# EAGLE board A13-LCD10TS_Rev_A (EAGLE 6.4)
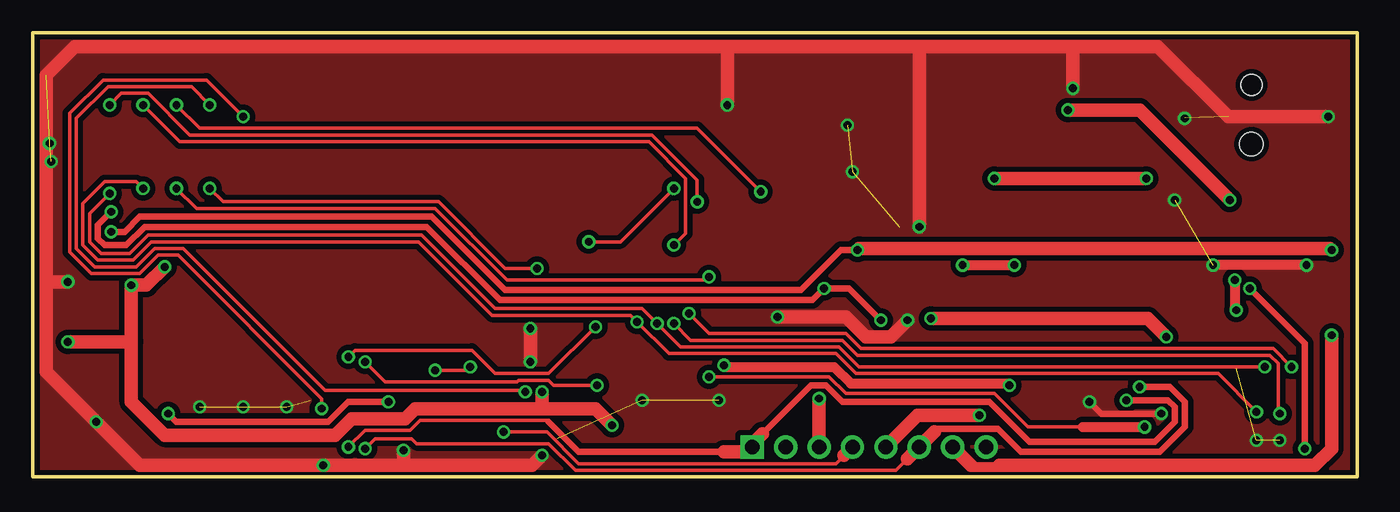
[diagram p0: board, top side]
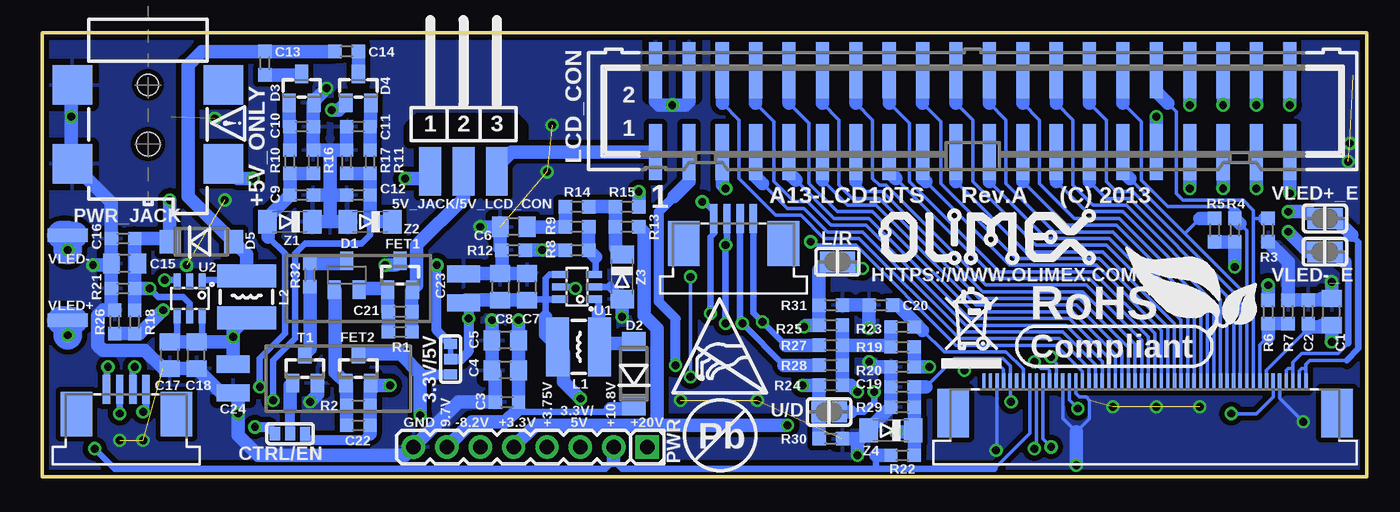
[diagram p1: board, bottom side, seen from below]

Size 100.76 x 33.81 mm. Coordinates in mm from the lower left corner, seen from the top.
Outline: 0,33.81 0,0 100.76,0 100.76,33.81 0,33.81
Copper layers (1+16): Top 0.035mm / dielectric 1.5mm / Bottom 0.035mm
Design rules "default": minimum track width 9.5mil, minimum drill 0.6mm, track to track 9.5mil, track to pad 9.5mil, pad to pad 9.5mil, via to via 10mil, smd to smd 1mil, copper to edge 10mil, drill to drill 8mil, minimum pad ring 8mil, minimum via ring 8mil, stop-mask expansion 4mil, vias tented up to drill 25mil, thermal gap 20mil
Net classes: 1 pwr: width 0.254 mm, drill 0.254 mm, clearance 0.241 mm
bRestrict: 5 lines

## Footprints (pad centres in the part's own frame; a part is rotated, then mirrored left to right if it is on the bottom)
SJ_2_SMALL_12_TIED = smd 0.762 x 1.016: 1 -1.143,0; 2 0,0; 3 1.143,0
HN1X3-SMD = smd 1.651 x 3.683: 1 -2.54,-0.229; 2 0,-0.229; 3 2.54,-0.229
C0805_5MIL_DWS = smd 1.27 x 1.524: 1 -1.016,0; 2 1.016,0
C0603_DWS = smd 1.016 x 1.016: 1 -0.889,0; 2 0.889,0
C-SMD5X11-M = smd 2.5 x 1.3: + 0,-1.1; - 0,1.1
SJ_2_SMALL = smd 0.762 x 1.016: 1 -1.143,0; 2 0,0; 3 1.143,0
SOT23C = smd 1 x 1.4: 1 -0.95,-1.1; 2 0.95,-1.1; 3 0,1.1
MLL-41 = smd 1.45 x 1.8: A 2.445,0; K -2.445,0
SOT23C(BAT54S) = smd 1 x 1.4: 1 -0.95,-1.1; 2 0.95,-1.1; 3 0,1.1
SOT23 = smd 1 x 1.4: 1 -0.95,-1.1; 2 0.95,-1.1; 3 0,1.1
CD42(43) = smd 4.5 x 1.75: 1 0,1.6; 2 0,-1.6
SJ = smd 1.168 x 1.6: 1 -0.762,0; 2 0.762,0
LCD10"_TOUCH(F101T50) = smd 0.25 x 1.3 bottom: 1 104.95,54.35; 2 105.45,54.35; 3 105.95,54.35; 4 106.45,54.35; 5 106.95,54.35; 6 107.45,54.35; 7 107.95,54.35; 8 108.45,54.35; 9 108.95,54.35; 10 109.45,54.35; 11 109.95,54.35; 12 110.45,54.35; 13 110.95,54.35; 14 111.45,54.35; 15 111.95,54.35; 16 112.45,54.35; 17 112.95,54.35; 18 113.45,54.35; 19 113.95,54.35; 20 114.45,54.35; 21 114.95,54.35; 22 115.45,54.35; 23 115.95,54.35; 24 116.45,54.35; 25 116.95,54.35; 26 117.45,54.35; 27 117.95,54.35; 28 118.45,54.35; 29 118.95,54.35; 30 119.45,54.35; 31 119.95,54.35; 32 120.45,54.35; 33 120.95,54.35; 34 121.45,54.35; 35 121.95,54.35; 36 122.45,54.35; 37 122.95,54.35; 38 123.45,54.35; 39 123.95,54.35; 40 124.45,54.35; 41 124.95,54.35; 42 125.45,54.35; 43 125.95,54.35; 44 126.45,54.35; 45 126.95,54.35; 46 127.45,54.35; 47 127.95,54.35; 48 128.45,54.35; 49 128.95,54.35; 50 129.45,54.35 | smd 0.55 x 2.2 bottom: 51 193.195,53.799; 52 194.195,53.799; 53 195.195,53.799; 54 196.195,53.799; 55 146.995,66.799; 56 147.995,66.799; 57 148.995,66.799; 58 149.995,66.799 | smd 2.4 x 3.7 bottom: P1 131.8,51.975; P2 102.6,51.975 | smd 2.4 x 3.4 bottom: P3 190.895,51.899; P4 198.495,51.899; P5 144.695,64.899; P6 152.295,64.899
ML40-MALE(GBH-254-SMT-40) = smd 1 x 4.25: 1 -24.13,-3.125; 2 -24.13,3.125; 3 -21.59,-3.125; 4 -21.59,3.125; 5 -19.05,-3.125; 6 -19.05,3.125; 7 -16.51,-3.125; 8 -16.51,3.125; 9 -13.97,-3.125; 10 -13.97,3.125; 11 -11.43,-3.125; 12 -11.43,3.125; 13 -8.89,-3.125; 14 -8.89,3.125; 15 -6.35,-3.125; 16 -6.35,3.125; 17 -3.81,-3.125; 18 -3.81,3.125; 19 -1.27,-3.125; 20 -1.27,3.125; 21 1.27,-3.125; 22 1.27,3.125; 23 3.81,-3.125; 24 3.81,3.125; 25 6.35,-3.125; 26 6.35,3.125; 27 8.89,-3.125; 28 8.89,3.125; 29 11.43,-3.125; 30 11.43,3.125; 31 13.97,-3.125; 32 13.97,3.125; 33 16.51,-3.125; 34 16.51,3.125; 35 19.05,-3.125; 36 19.05,3.125; 37 21.59,-3.125; 38 21.59,3.125; 39 24.13,-3.125; 40 24.13,3.125
HN1X8 = drill 1.1 pad 1.778 square: 1 -8.89,0 | drill 1.1 pad 1.778: 2 -6.35,0; 3 -3.81,0; 4 -1.27,0; 5 1.27,0; 6 3.81,0; 7 6.35,0; 8 8.89,0
PWR-JACK-SMD = smd 3 x 3: 1 6,5.75; 2 0,-5.75; 3 6,-5.75; 4 0,5.75 | hole 1.6: 0,0 | hole 1.8: 4.5,0
R0603_5MIL_DWS = smd 1.016 x 1.016: 1 -0.889,0; 2 0.889,0
0603_0R = smd 1.016 x 1.016: 1 -0.889,0; 2 0.889,0
SOT-23 = smd 1 x 1.4: 1 -0.95,-1.1; 2 0.95,-1.1; 3 0,1.1
SOT23-6 = smd 0.55 x 1.2: 1 -0.95,-1.3; 2 0,-1.3; 3 0.95,-1.3; 4 0.95,1.3; 5 0,1.3; 6 -0.95,1.3
SMD120X40 = smd 3.048 x 1.016: 1 0,0
MINI-MELF = smd 1.4 x 1.8: 1 -1.7,0; 2 1.7,0

## Placement (x,y rotation side)
3.3V/5V  5V:Close/3.3V:Open  [SJ_2_SMALL_12_TIED]  69.69,8.97 270 bottom
5V_JACK/5V_LCD_CON  H-WX-1x3  [HN1X3-SMD]  68.71,23.5 0 bottom
C1  22uF/6.3V  [C0805_5MIL_DWS]  2.67,12.57 90 bottom
C2  100nF  [C0603_DWS]  4.45,12.57 90 bottom
C3  100nF  [C0603_DWS]  65.41,5.71 180 bottom
C4  1uF/25V  [C0805_5MIL_DWS]  65.53,8.13 180 bottom
C5  1uF/25V  [C0805_5MIL_DWS]  65.53,10.41 180 bottom
C6  10uF/16V  [C0805_5MIL_DWS]  64.9,19.05 180 bottom
C7  22uF/6.3V  [C0805_5MIL_DWS]  63.88,14.48 270 bottom
C8  22uF/6.3V  [C0805_5MIL_DWS]  65.91,14.48 270 bottom
C9  100nF  [C0603_DWS]  81.03,21.46 0 bottom
C10  100nF  [C0603_DWS]  81.03,26.67 0 bottom
C11  100nF  [C0603_DWS]  76.71,26.67 180 bottom
C12  100nF  [C0603_DWS]  76.71,21.46 180 bottom
C13  100nF  [C0603_DWS]  83.82,31.5 90 bottom
C14  100nF  [C0603_DWS]  77.6,32.38 0 bottom
C15  10uF/16V  [C0805_5MIL_DWS]  94.49,16.26 180 bottom
C16  100nF  [C0603_DWS]  94.61,18.16 180 bottom
C17  22uF/6.3V  [C0805_5MIL_DWS]  91.06,9.27 90 bottom
C18  22uF/6.3V  [C0805_5MIL_DWS]  89.03,9.27 90 bottom
C19  100nF  [C0603_DWS]  35.31,6.86 180 bottom
C20  100nF  [C0603_DWS]  36.96,13.08 180 bottom
C21  NA  [C0603_DWS]  73.53,12.57 180 bottom
C22  NA  [C0603_DWS]  76.71,3.94 180 bottom
C23  NA(100uF/16V)  [C-SMD5X11-M]  68.71,14.35 0 bottom
C24  NA(100uF/16V)  [C-SMD5X11-M]  86.23,7.49 180 bottom
CTRL/EN  CTRL:Close/EN:Open  [SJ_2_SMALL]  81.92,3.3 180 bottom
D1  BAT54C  [SOT23C]  77.6,15.37 0 bottom
D2  1N5819/SS14  [MLL-41]  55.75,7.87 90 bottom
D3  BAT54S  [SOT23C(BAT54S)]  81.03,29.59 0 bottom
D4  BAT54S  [SOT23C(BAT54S)]  76.71,29.59 0 bottom
D5  1N5819/SS14  [MLL-41]  88.65,17.91 0 bottom
FET1  IRLML6402  [SOT23]  73.53,15.37 0 bottom
FET2  IRLML6402  [SOT23]  76.71,8.26 0 bottom
L1  4.7uH/1.15A/DCR<0.1R/CD43  [CD42(43)]  59.94,9.91 90 bottom
L2  4.7uH/1.15A/DCR<0.1R/CD43  [CD42(43)]  85.22,13.72 180 bottom
L/R  Open  [SJ]  40.26,16.38 0 bottom
LCD  F101T50+(FPV-WZA21-50-LF)+(FPA-WZB25-04-LF)  [LCD10"_TOUCH(F101T50)]  -100.33,-47.12 0 top
LCD_CON  ML40-GBH-254-SMT-40  [ML40-MALE(GBH-254-SMT-40)]  29.97,27.86 0 bottom
PWR  NA(HN1X8)  [HN1X8]  63.63,2.29 180 bottom
PWR_JACK  DCJ-W54R-20-LF  [PWR-JACK-SMD]  92.71,29.84 270 bottom
R1  10k  [R0603_5MIL_DWS]  73.53,11.05 0 bottom
R2  10k  [R0603_5MIL_DWS]  76.71,5.46 0 bottom
R3  NA  [R0603_5MIL_DWS]  7.49,18.8 90 bottom
R4  NA  [R0603_5MIL_DWS]  10.03,18.8 90 bottom
R5  NA  [R0603_5MIL_DWS]  11.56,18.8 90 bottom
R6  NA  [R0603_5MIL_DWS]  7.49,12.57 270 bottom
R7  10k  [R0603_5MIL_DWS]  5.97,12.57 270 bottom
R8  2.2k  [R0603_5MIL_DWS]  60.07,17.27 180 bottom
R9  20k  [R0603_5MIL_DWS]  60.07,19.05 180 bottom
R10  1.05k/1%  [R0603_5MIL_DWS]  81.92,24 90 bottom
R11  1.05k/1%  [R0603_5MIL_DWS]  75.82,24 90 bottom
R12  1.1R  [R0603_5MIL_DWS]  64.9,17.27 180 bottom
R13  4.7k  [R0603_5MIL_DWS]  56.26,19.05 0 bottom
R14  4.7k  [R0603_5MIL_DWS]  60.07,20.57 180 bottom
R15  220R  [R0603_5MIL_DWS]  56.26,20.57 180 bottom
R16  56.2k/1%  [R0603_5MIL_DWS]  80.14,24 270 bottom
R17  56.2k/1%  [R0603_5MIL_DWS]  77.6,24 270 bottom
R18  56.2k/1%  [R0603_5MIL_DWS]  93.73,11.81 90 bottom
R19  10k  [R0603_5MIL_DWS]  35.31,9.91 0 bottom
R20  NA  [R0603_5MIL_DWS]  35.31,8.38 0 bottom
R21  20k  [R0603_5MIL_DWS]  94.61,14.35 0 bottom
R22  1.05k/1%  [R0603_5MIL_DWS]  35.31,1.65 0 bottom
R23  10k  [R0603_5MIL_DWS]  35.31,11.43 0 bottom
R24  NA  [R0603_5MIL_DWS]  40.77,6.99 180 bottom
R25  10k  [R0603_5MIL_DWS]  40.77,11.56 180 bottom
R26  1.05k/1%  [R0603_5MIL_DWS]  95.25,11.81 90 bottom
R27  NA  [R0603_5MIL_DWS]  40.77,10.03 180 bottom
R28  NA  [R0603_5MIL_DWS]  40.77,8.51 180 bottom
R29  562R/1%  [R0603_5MIL_DWS]  35.31,5.33 180 bottom
R30  10k  [R0603_5MIL_DWS]  40.77,2.92 0 bottom
R31  NA  [R0603_5MIL_DWS]  40.77,13.08 0 bottom
R32  0R(Board_Mounted)  [0603_0R]  80.39,15.37 270 bottom
T1  DTC114YKA  [SOT-23]  80.77,8.26 0 bottom
U1  AP3031KTR-G1  [SOT23-6]  60.07,14.48 90 bottom
U2  AP3031KTR-G1  [SOT23-6]  89.53,13.59 180 bottom
U$4  [ATTENTION_SMALL]  85.34,25.65 90 bottom
U$8  [OLIMEX1_V]  19.43,16.02 0 bottom
U$9  [PB]  49.18,3.18 0 bottom
U$10  [ESD_SYMBOL]  52.78,6.42 0 bottom
U$11  [RECYCLE_BIN1/8]  32.36,8.27 0 bottom
U$12  [ROHS]  25.61,9.06 0 bottom
U/D  Open  [SJ]  40.89,4.95 0 bottom
VLED+  TESTPAD120X40  [SMD120X40]  98.81,11.94 180 bottom
VLED+_E  NA  [SJ]  3.17,19.68 180 bottom
VLED-  TESTPAD120X40  [SMD120X40]  98.81,18.41 180 bottom
VLED-_E  NA  [SJ]  3.17,17.14 180 bottom
Z1  BZV55C8V2  [MINI-MELF]  81.92,19.43 180 bottom
Z2  BZV55C20  [MINI-MELF]  75.82,19.43 180 bottom
Z3  NA(BZV55C3V0)  [MINI-MELF]  56.64,15.24 270 bottom
Z4  NA(BZV55C3V9)  [MINI-MELF]  36.2,3.56 180 bottom

## Library data of the parts
3.3V/5V 5V_JACK/5V_LCD_CON CTRL/EN L/R U/D VLED+_E VLED-_E = jumper
C1-C24 R1-R31 = rcl
D1 D3 D4 = semicon-smd-ipc
D2 D5 PWR_JACK VLED+ VLED- Z1-Z4 = gogo
FET1 FET2 PWR = Penko
L1 L2 R32 T1 = OLIMEX_DISCRET
LCD = olimex_lcd
LCD_CON = con-harting-ml
U1 U2 = OLIMEX_IC
U$4 U$8-U$12 = olimex_logo1

## Nets
+5V: 3.3V/5V.2 C7.2 C8.2 C17.2 C18.2 C23.+ C24.+ L1.1 L2.1 PWR.3 U1.4 U1.6 U2.4 U2.6
+12V: C15.1 C16.1 D4.1 D5.K LCD.43 PWR.2 R18.2 R21.2 R22.1 U2.5
+15V: C12.1 LCD.41 PWR.1 R11.1 R17.2 Z2.1
-24V: C9.1 LCD.42 PWR.6 R10.1 R16.2 Z1.2
GND [pwr]: C1.2 C2.2 C3.2 C4.2 C5.2 C6.2 C7.1 C8.1 C9.2 C10.2 C11.2 C12.2 C15.2 C16.2 C17.1 C18.1 C19.2 C20.2 C23.- C24.- D3.2 LCD.5 LCD.36 LCD.38 LCD.48 LCD_CON.2 LCD_CON.4 PWR.8 PWR_JACK.2 PWR_JACK.3 R3.1 R7.1 R12.2 R16.1 R17.1 R20.1 R21.1 R26.2 R29.2 R30.2 R31.2 T1.2 U1.2 Z1.1 Z2.2 Z3.2 Z4.2
LCD_B0: LCD.19 LCD_CON.21
LCD_B1: LCD.18 LCD_CON.22
LCD_B2: LCD.17 LCD_CON.23
LCD_B3: LCD.16 LCD_CON.24
LCD_B4: LCD.15 LCD_CON.25
LCD_B5: LCD.14 LCD_CON.26
LCD_B6: LCD.13 LCD_CON.27
LCD_B7: LCD.12 LCD_CON.28
LCD_BKL: LCD_CON.36 R15.1
LCD_CLK: LCD.37 LCD_CON.31
LCD_DE: LCD.9 LCD_CON.32 R3.2
LCD_G0: LCD.27 LCD_CON.13
LCD_G1: LCD.26 LCD_CON.14
LCD_G2: LCD.25 LCD_CON.15
LCD_G3: LCD.24 LCD_CON.16
LCD_G4: LCD.23 LCD_CON.17
LCD_G5: LCD.22 LCD_CON.18
LCD_G6: LCD.21 LCD_CON.19
LCD_G7: LCD.20 LCD_CON.20
LCD_HSYNC: LCD.11 LCD_CON.29 R5.2
LCD_L/R: L/R.1 LCD.39 R25.2 R31.1
LCD_PWRE: CTRL/EN.3 LCD_CON.35
LCD_R0: LCD.35 LCD_CON.5
LCD_R1: LCD.34 LCD_CON.6
LCD_R2: LCD.33 LCD_CON.7
LCD_R3: LCD.32 LCD_CON.8
LCD_R4: LCD.31 LCD_CON.9
LCD_R5: LCD.30 LCD_CON.10
LCD_R6: LCD.29 LCD_CON.11
LCD_R7: LCD.28 LCD_CON.12
LCD_U/D: LCD.40 R24.2 R30.1 U/D.1
LCD_VSYNC: LCD.10 LCD_CON.30 R4.2
N$1: LCD.8 R6.2 R7.2
N$2: C14.2 D4.3
N$3 [pwr]: C22.1 CTRL/EN.1 FET2.2 LCD_CON.3 R2.2
N$4: C11.1 D4.2 R11.2
N$5: R8.1 R9.1 U1.3
N$6: C10.1 D3.1 R10.2
N$7: 5V_JACK/5V_LCD_CON.2 C21.1 FET1.2 R1.2
N$8: C22.2 D1.1 FET2.1 R2.1
N$9: C21.2 D1.2 FET1.1 R1.1
N$10: C13.1 D3.3
N$11: R32.2 T1.3
N$12: C6.1 R9.2 R14.2
N$13: D2.A L1.2 U1.1
N$14: R13.1 R14.1 R15.2 Z3.1
N$15: L/R.2 LCD_CON.33
N$16: CTRL/EN.2 T1.1
N$17: LCD_CON.34 U/D.2
N$18: 3.3V/5V.1 FET1.3
N$19: D1.3 R32.1
N$20: 5V_JACK/5V_LCD_CON.3 LCD_CON.1
N$21: LCD.1 LCD.2 VLED+_E.1
N$22: 5V_JACK/5V_LCD_CON.1 PWR_JACK.1
N$23: LCD.3 LCD.4 VLED-_E.1
N$24 [pwr]: U2.2
N$42: LCD.47 R19.2 R20.2
N$123: C13.2 C14.1 D5.A L2.2 U2.1
N$126: R18.1 R26.1 U2.3
RESET: C20.1 LCD.44 R23.2
TPX1: LCD.51 LCD.55 LCD_CON.37 R27.2
TPX2: LCD.53 LCD.57 LCD_CON.38
TPY1: LCD.52 LCD.56 LCD_CON.39 R28.2
TPY2: LCD.54 LCD.58 LCD_CON.40
VCC [pwr]: 3.3V/5V.3 C1.1 C2.1 FET2.3 LCD.7 PWR.5 R4.1 R5.1 R6.1 R13.2 R19.1 R23.1 R24.1 R25.1 R27.1 R28.1
VCOM: C19.1 LCD.6 LCD.46 PWR.4 R22.2 R29.1 Z4.1
VLED+: C3.1 C4.1 C5.1 D2.K PWR.7 U1.5 VLED+.1 VLED+_E.2
VLED-: R8.2 R12.1 VLED-.1 VLED-_E.2

## Tracks (layer width: path | path; a pad name or v marks a point on that pad's centre or on a via)
+5V  (via drill 0.6)
  Top 1.016: v68.33,12.06 84.84,12.06 v86.23,10.67 | PWR.3 v59.82,5.97
  Bottom 0.508: 62.48,13.53 63.81,13.53 C7.2 | U1.4 62.17,15.43 62.48,15.11 62.48,13.59 | U2.6 88.58,10.73 C18.2 | U2.4 90.48,10.86 C17.2 | 62.48,13.53 U1.6 | 62.48,13.59 62.48,13.53 | 62.48,12.19 62.48,13.59
  Bottom 0.762: 3.3V/5V.2 68.88,8.97 68.33,9.53 v68.33,12.06 68.33,12.87 C23.+
  Bottom 1.016: L2.1 86.23,11.1 v86.23,10.67 86.23,10.29 | 86.23,10.29 C24.+ | C17.2 C18.2 86.23,10.29 | C23.+ 68.5,13.46 C8.2 C7.2 | 62.48,12.19 62.48,10.85 L1.1 61.09,9.45 61.09,7.24 v59.82,5.97
+12V  (via drill 0.6)
  Top 0.508: v96.77,2.16 96.77,10.16 v92.58,14.35
  Top 1.016: v91.06,21.08 84.2,27.94 v78.74,27.94
  Bottom 0.254: LCD.43 25.62,3.34 28.32,0.64
  Bottom 0.508: v92.58,14.35 91.95,13.72 90.04,13.72 89.53,13.21 U2.5 | 28.32,0.64 37.34,0.64 | 37.34,0.64 56.64,0.64 57.28,1.27 57.91,0.64 95.25,0.64 v96.77,2.16 | 37.34,0.64 37.34,1.65
  Bottom 1.016: R21.2 93.73,16.26 C15.1 93.73,16.51 C16.1 91.34,18.16 D5.K 91.06,17.94 v91.06,21.08 | v92.58,14.35 R21.2 | R21.2 R18.2 | 37.34,1.65 R22.1 | 57.28,1.27 PWR.2 | D4.1 78.21,27.94 v78.74,27.94
+15V  (via drill 0.6)
  Top 0.254: v24,2.29 25.27,3.56 28.7,3.56 29.46,4.32 39.12,4.32 39.24,4.19
  Top 0.508: 39.24,4.19 41.53,1.91 52.58,1.91 | v83.19,5.84 86.36,5.84 86.87,5.33 86.87,4.19 85.34,2.67 75.82,2.67 72.77,5.71 61.59,5.71 60.33,6.99 59.18,6.99 55.5,3.3
  Top 1.016: 52.58,1.91 54.48,1.91 54.48,2.03 PWR.1 54.74,2.54 55.5,3.3
  Bottom 0.254: v24,2.29 24.62,2.9 LCD.41
  Bottom 0.508: v83.19,5.84 83.19,8.89 81.53,10.54 81.53,17.02 80.77,17.78 76.45,17.78 75.82,18.41 75.82,19.43
  Bottom 0.762: 74.12,19.35 Z2.1
  Bottom 1.016: R17.2 R11.1 C12.1 75.82,19.43 74.2,19.43 74.12,19.35
-24V  (via drill 0.6)
  Top 0.254: 66.55,1.4 65.66,0.51 41.27,0.51 39.24,2.54 29.21,2.54 28.83,2.92 26.04,2.92 v25.27,2.16
  Top 0.508: 68.58,3.43 68.83,3.68 73.41,3.68 75.18,1.91 85.72,1.91 87.63,3.81 87.63,5.71 86.49,6.86 v84.2,6.86
  Top 1.016: 68.58,3.43 PWR.6 66.55,1.4
  Bottom 0.254: LCD.42 25.12,2.31 v25.27,2.16
  Bottom 0.508: 83.57,18.29 82.3,17.02 82.3,10.92 84.2,9.02 v84.2,6.86
  Bottom 1.016: R16.2 R10.1 C9.1 83.61,19.76 Z1.2 83.57,19.38 83.57,18.29
GND  (via drill 0.6)  (13 unrouted)
  Top 0.508: v80.39,5.71 81.28,4.83 v85.85,4.83
  Top 0.762: v96.9,16.13 v89.79,16.13
  Top 1.016: 52.83,32.77 v52.83,28.32 | 52.83,32.77 3.17,32.77 1.02,30.61 1.02,14.86 | 1.02,14.86 v2.67,14.86 | 1.02,14.86 1.02,8 v4.83,4.19 8.13,0.89 v22.1,0.89 28.19,0.89 | 28.19,0.89 37.97,0.89 v38.73,1.65 | 28.19,0.89 v28.19,2.03 | 79.12,32.77 v79.12,29.59 | 67.44,32.77 79.12,32.77 | v37.85,8.76 v37.85,11.3 | v56.64,12.19 61.85,12.19 63.37,10.67 65.28,10.67 v66.55,11.94 | 67.44,32.77 v67.44,19.05 | 79.12,32.77 85.6,32.77 90.93,27.43 v98.55,27.43 | 52.83,32.77 67.44,32.77
  Bottom 0.254: LCD.38 23.12,4.45 22.1,3.43 21.08,4.45 21.08,5.84 21.34,6.1 21.84,6.1 22.12,6.37 LCD.36 | LCD.48 28.12,2.11 v28.19,2.03 | LCD.5 6.62,5.99 v4.83,4.19
  Bottom 0.508: v89.79,16.13 89.53,15.88 | 57.53,14.48 U1.2
  Bottom 0.762: Z3.2 56.64,13.59 57.53,14.48
  Bottom 1.016: R3.1 5.97,16.38 R7.1 C2.2 3.56,13.46 3.43,13.59 C1.2 v2.67,14.86 | C15.2 C16.2 95.5,20.89 PWR_JACK.3 98.55,23.94 v98.55,27.43 98.55,29.75 PWR_JACK.2 | C15.2 R21.1 95.5,12.95 R26.2 96.14,12.7 96.52,12.32 96.52,10.03 96.14,9.65 92.96,9.65 91.57,8.26 C17.1 C18.1 87.17,6.39 C24.- 85.85,6.01 v85.85,4.83 85.85,3.17 84.33,1.65 73.15,1.65 PWR.8 69.09,5.71 C3.2 66.29,7.87 C4.2 C5.2 v66.55,11.94 | C11.2 R17.1 78.87,24.89 | 78.87,19.43 Z2.2 | 78.87,19.43 Z1.1 | 78.87,24.89 R16.1 C10.2 80.14,28.43 D3.2 80.08,28.64 v79.12,29.59 | 78.87,24.89 78.87,21.46 | 78.87,21.46 C12.2 | 78.87,21.46 C9.2 | 78.87,21.46 78.87,19.43 | T1.2 79.82,6.28 v80.39,5.71 | LCD_CON.2 54.1,28.57 53.85,28.32 v52.83,28.32 51.82,28.32 51.56,28.57 LCD_CON.4 | C23.- 68.66,15.49 C8.1 | C8.1 C7.1 | C8.1 65.79,15.62 R12.2 65.91,17.4 C6.2 v67.44,19.05 | 38.73,2.92 38.53,2.92 Z4.2 37.9,3.63 R29.2 C19.2 R20.1 37.47,8.38 v37.85,8.76 | 38.73,2.92 R30.2 | v38.73,1.65 38.73,2.92 | v22.1,0.89 22.1,3.43 | v37.85,11.3 C20.2 R31.2 | C15.2 95.5,16.13 v96.9,16.13 | v56.64,12.19 Z3.2
  other vias: 12.7,5.33 16,5.33 19.3,5.33 46.35,5.84 52.2,5.84 93.09,2.79 94.87,2.79 1.4,24 87.63,27.3 86.87,21.08 1.27,25.4 62.36,23.24 61.98,26.8
  pour Top (isolate 0.406, rank 2): -2.54,35.56 -2.54,-2.54 104.14,-2.54 104.14,35.56
  pour Bottom (isolate 0.406, rank 3): -5.08,-5.08 109.22,-5.08 109.22,38.1 -5.08,38.1
LCD_B0
  Bottom 0.254: 28.7,22.48 24.38,18.16 19.56,18.16 13.62,12.22 LCD.19
  Bottom 1.016: 28.7,22.48 LCD_CON.21
LCD_B1
  Bottom 0.254: 28.7,28.45 27.43,27.18 27.43,22.35 23.75,18.67 19.3,18.67 13.12,12.48 LCD.18
  Bottom 1.016: 28.7,28.45 LCD_CON.22
LCD_B2
  Bottom 0.254: 26.16,22.48 22.86,19.18 19.05,19.18 12.62,12.75 LCD.17
  Bottom 1.016: 26.16,22.48 LCD_CON.23
LCD_B3
  Bottom 0.254: 26.16,28.45 24.89,27.18 24.89,22.35 22.23,19.68 18.8,19.68 12.12,13.01 LCD.16
  Bottom 1.016: 26.16,28.45 LCD_CON.24
LCD_B4
  Bottom 0.254: 23.62,22.48 21.34,20.19 18.54,20.19 11.62,13.27 LCD.15
  Bottom 1.016: 23.62,22.48 LCD_CON.25
LCD_B5
  Bottom 0.254: LCD.14 11.12,13.53 18.29,20.7 20.83,20.7 22.35,22.23 22.35,27.18 23.62,28.45
  Bottom 1.016: 23.62,28.45 LCD_CON.26
LCD_B6
  Bottom 0.254: 21.08,22.48 19.81,21.21 18.03,21.21 10.62,13.79 LCD.13
  Bottom 1.016: 21.08,22.48 LCD_CON.27
LCD_B7
  Bottom 0.254: 21.08,28.45 19.81,27.18 19.81,22.48 19.05,21.72 17.78,21.72 10.12,14.06 LCD.12
  Bottom 1.016: 21.08,28.45 LCD_CON.28
LCD_BKL  (via drill 0.6)
  Top 0.254: v10.92,28.32 12.7,26.54 50.55,26.54 v55.37,21.72
  Bottom 1.016: v10.92,28.32 LCD_CON.36 | v55.37,21.72 R15.1
LCD_CLK  (via drill 0.6)
  Top 0.254: v21.97,5.21 21.97,5.97 11.05,16.89 9.53,16.89 8.13,15.49 4.45,15.49 2.79,17.14 2.79,27.69 5.33,30.23 13.21,30.23 v16,27.43
  Bottom 0.254: LCD.37 22.62,5.86 v21.97,5.21
  Bottom 1.016: v16,27.43 LCD_CON.31
LCD_DE
  Bottom 0.254: LCD.9 8.62,19.68 | 8.62,19.68 8.62,20.3 9.4,21.08 13.97,21.08 14.48,21.59 14.48,27.81 15.11,28.45 | 8.62,19.68 8.64,19.68 | 8.62,19.68 7.75,19.68
  Bottom 1.016: 15.11,28.45 16,29.34 LCD_CON.32 | 7.75,19.68 R3.2
LCD_G0
  Bottom 0.254: 38.86,22.48 38.1,21.72 36.83,21.72 29.21,14.1 21.59,14.1 17.62,10.13 LCD.27
  Bottom 1.016: 38.86,22.48 LCD_CON.13
LCD_G1
  Bottom 0.254: 38.86,28.45 37.59,27.18 37.59,22.73 37.08,22.23 36.58,22.23 28.96,14.61 21.34,14.61 17.12,10.39 LCD.26
  Bottom 1.016: 38.86,28.45 LCD_CON.14
LCD_G2
  Bottom 0.254: 35.81,22.73 28.19,15.11 21.08,15.11 16.62,10.65 LCD.25
  Bottom 1.016: 35.81,22.73 36.32,23.24 LCD_CON.15
LCD_G3
  Bottom 0.254: 36.32,28.45 34.8,26.92 34.8,22.48 27.94,15.62 20.83,15.62 16.12,10.91 LCD.24
  Bottom 1.016: 36.32,28.45 LCD_CON.16
LCD_G4
  Bottom 0.254: 33.53,22.48 27.18,16.13 20.57,16.13 15.62,11.18 LCD.23
  Bottom 1.016: 33.53,22.48 33.78,22.73 LCD_CON.17
LCD_G5
  Bottom 0.254: 33.78,28.45 32.38,27.05 32.38,22.35 26.67,16.64 20.32,16.64 15.12,11.44 LCD.22
  Bottom 1.016: 33.78,28.45 LCD_CON.18
LCD_G6
  Bottom 0.254: 31.24,22.48 25.91,17.14 20.07,17.14 14.62,11.7 LCD.21
  Bottom 1.016: 31.24,22.48 LCD_CON.19
LCD_G7
  Bottom 0.254: 31.24,28.45 29.97,27.18 29.97,22.48 25.15,17.65 19.81,17.65 14.12,11.96 LCD.20
  Bottom 1.016: 31.24,28.45 LCD_CON.20
LCD_HSYNC
  Bottom 0.254: LCD.11 9.62,14.32 13.84,18.54 | 13.84,18.54 12.7,19.68 | 13.84,18.54 18.03,22.73
  Bottom 1.016: 12.7,19.68 R5.2 | LCD_CON.29 18.54,23.24 18.03,22.73
LCD_L/R  (via drill 0.6)
  Top 0.254: v24,9.14 24.51,9.65 33.4,9.65 35.18,7.87 39.24,7.87 v42.8,11.43
  Bottom 0.254: LCD.39 23.62,8.63 24,9.02 v24,9.14
  Bottom 1.016: v42.8,11.43 42.67,11.56 R25.2 R31.1 41.66,15.75 L/R.1
LCD_PWRE  (via drill 0.6)
  Top 0.254: v10.92,21.97 12.45,20.45 30.61,20.45 36.07,14.99 51.18,14.99 v51.44,15.24 | 79.88,3.81 75.69,3.81 73.15,6.35 61.85,6.35 60.58,7.62 v51.44,7.62
  Top 0.762: 79.88,3.81 v84.58,3.81
  Bottom 0.254: v51.44,15.24 v51.44,7.62
  Bottom 0.762: v84.58,3.81 83.57,3.81 CTRL/EN.3
  Bottom 1.016: v10.92,21.97 LCD_CON.35
LCD_R0  (via drill 0.6)
  Top 0.254: v42.29,17.91 44.7,17.91 v48.77,21.97
  Bottom 0.254: LCD.35 21.62,8.03 23.62,10.03 31.24,10.03 38.86,17.65 42.04,17.65 v42.29,17.91
  Bottom 1.016: v48.77,21.97 49.02,22.23 LCD_CON.5
LCD_R1
  Bottom 0.254: 49.02,28.45 47.75,27.18 47.75,22.73 44.96,19.94 43.05,19.94 41.27,18.16 38.61,18.16 30.99,10.54 23.37,10.54 21.12,8.29 LCD.34
  Bottom 1.016: 49.02,28.45 LCD_CON.6
LCD_R2
  Bottom 0.254: 45.97,22.35 44.07,20.45 42.8,20.45 41.02,18.67 38.35,18.67 30.73,11.05 23.11,11.05 20.62,8.55 LCD.33
  Bottom 1.016: 45.97,22.35 46.48,22.86 LCD_CON.7
LCD_R3
  Bottom 0.254: 46.48,28.45 45.09,27.05 45.09,22.48 43.56,20.95 42.55,20.95 40.77,19.18 38.1,19.18 30.48,11.56 22.86,11.56 20.12,8.82 LCD.32
  Bottom 1.016: 46.48,28.45 LCD_CON.8
LCD_R4
  Bottom 0.254: 43.43,22.61 40.51,19.68 37.85,19.68 30.23,12.06 22.61,12.06 19.62,9.08 LCD.31
  Bottom 1.016: 43.43,22.61 43.94,23.11 LCD_CON.9
LCD_R5
  Bottom 0.254: 43.94,28.45 42.42,26.92 42.42,22.35 40.26,20.19 37.59,20.19 29.97,12.57 22.35,12.57 19.12,9.34 LCD.30
  Bottom 1.016: 43.94,28.45 LCD_CON.10
LCD_R6
  Bottom 0.254: 41.4,22.61 39.5,20.7 37.34,20.7 29.72,13.08 22.1,13.08 18.62,9.6 LCD.29
  Bottom 1.016: 41.4,22.61 LCD_CON.11
LCD_R7
  Bottom 0.254: 41.4,28.45 40.13,27.18 40.13,22.23 39.12,21.21 37.08,21.21 29.46,13.59 21.84,13.59 18.12,9.87 LCD.28
  Bottom 1.016: 41.4,28.45 LCD_CON.12
LCD_U/D  (via drill 0.6)
  Top 0.254: v25.27,8.76 26.8,7.24 36.83,7.24 36.96,7.37 39.24,7.37 39.62,6.99 v42.93,6.99
  Bottom 0.254: LCD.40 24.12,8.12 24.26,8.26 24.77,8.26 v25.27,8.76
  Bottom 1.016: R30.1 U/D.1 R24.2 v42.93,6.99
LCD_VSYNC
  Bottom 0.254: LCD.10 9.12,18.77 9.65,19.3 | 18.54,28.45 17.14,27.05 17.14,22.61 15.11,20.57 10.54,20.57 10.03,20.07
  Bottom 1.016: 18.54,28.45 LCD_CON.30 | 9.65,19.3 R4.2 10.03,20.07
N$1
  Bottom 0.254: LCD.8 8.12,10.04 7.49,10.67
  Bottom 1.016: R7.2 R6.2 7.49,10.67
N$2
  Bottom 1.016: D4.3 C14.2
N$3  (via drill 0.6)
  Top 0.762: v74.3,6.99 74.17,7.11 62.23,7.11 60.96,8.38 52.7,8.38 v52.58,8.51
  Bottom 0.762: 75.82,3.3 76.33,2.79 80.77,2.79 CTRL/EN.1 | v52.58,8.51 52.58,12.06 53.85,13.34 53.85,20.19 52.7,21.34
  Bottom 1.016: 75.82,3.3 C22.1 R2.2 75.82,7.16 FET2.2 75.59,6.99 v74.3,6.99 | LCD_CON.3 51.56,22.48 52.7,21.34
N$4
  Bottom 1.016: D4.2 75.76,26.73 C11.1 R11.2
N$5
  Bottom 0.508: U1.3 58.67,15.53 58.67,16.76
  Bottom 1.016: R9.1 R8.1 58.67,16.76
N$6
  Bottom 1.016: D3.1 81.98,26.73 C10.1 R10.2
N$7
  Bottom 1.016: R1.2 C21.1 72.64,14.21 FET1.2 72.26,14.59 72.26,17.65 68.71,21.21 5V_JACK/5V_LCD_CON.2
N$8
  Bottom 1.016: C22.2 R2.1 77.6,7.09 FET2.1 78.49,7.98 78.49,14.21 D1.1
N$9
  Bottom 1.016: D1.2 76.56,14.35 74.57,14.35 FET1.1 74.48,12.63 C21.2 R1.1
N$10
  Bottom 1.016: D3.3 81.11,30.61 C13.1
N$11
  Bottom 1.016: T1.3 80.39,9.74 R32.2
N$12
  Bottom 1.016: R14.2 R9.2 C6.1
N$13
  Bottom 0.508: U1.1 58.42,13.53 58.42,12.57
  Bottom 1.016: D2.A 55.91,10.16 58.09,10.16 L1.2 58.42,9.98 58.42,12.57
N$14
  Bottom 1.016: R14.1 R15.2 R13.1 57.15,17.45 Z3.1
N$15  (via drill 0.6)
  Top 0.254: v13.46,21.97 14.48,20.95 30.86,20.95 35.94,15.88 v38.35,15.88
  Bottom 1.016: v13.46,21.97 LCD_CON.33 | v38.35,15.88 38.99,15.88 L/R.2
N$16
  Bottom 0.762: CTRL/EN.2 81.92,5.21
  Bottom 1.016: T1.1 81.92,6.96 81.92,5.21
N$17  (via drill 0.6)
  Top 0.254: v13.46,28.32 12.06,29.72 5.71,29.72 3.3,27.3 3.3,17.4 4.7,16 7.87,16 9.27,17.4 11.43,17.4 22.23,6.6 37.34,6.6 v37.47,6.48
  Bottom 0.508: v37.47,6.48 37.47,5.71 38.23,4.95 39.24,4.95
  Bottom 1.016: v13.46,28.32 LCD_CON.34 | 39.24,4.95 U/D.2
N$18  (via drill 0.6)
  Top 0.762: v70.74,16.13 v74.68,16.13
  Bottom 0.762: 3.3V/5V.1 70.74,11.16 v70.74,16.13
  Bottom 1.016: FET1.3 73.87,16.13 v74.68,16.13
N$19
  Bottom 1.016: D1.3 77.81,16.26 R32.1
N$20
  Bottom 1.016: 66.17,23.62 66.17,22.73 | LCD_CON.1 65.05,24.73 66.17,23.62 | 66.17,23.62 5V_JACK/5V_LCD_CON.3
N$21
  Bottom 0.254: LCD.1 4.62,8.26 | 4.62,8.26 4.62,8.59 4.32,8.89 1.52,8.89 | LCD.2 5.12,8.09 4.95,8.26 4.62,8.26
  Bottom 0.508: 1.52,8.89 0.64,9.78 0.64,17.91 1.14,18.41
  Bottom 1.016: 1.14,18.41 VLED+_E.1
N$22  (via drill 0.6)
  Top 1.016: v73.15,22.73 v84.71,22.73
  Bottom 1.016: 5V_JACK/5V_LCD_CON.1 71.78,22.73 v73.15,22.73 | PWR_JACK.1 85.85,22.73 v84.71,22.73
N$23
  Bottom 0.254: 5.62,8.26 LCD.3 | 5.62,8.26 5.62,8.73 4.95,9.4 2.16,9.4 1.4,10.16 | LCD.4 6.12,8.1 5.97,8.26 5.62,8.26
  Bottom 0.508: 1.65,16.38 1.4,16.13 1.4,10.16
  Bottom 1.016: 1.65,16.38 VLED-_E.1
N$42  (via drill 0.6)
  Top 0.254: v30.61,8.13 33.02,8.13 v33.27,8.38
  Bottom 0.254: LCD.47 27.62,8.19 27.81,8.38 30.35,8.38 v30.61,8.13
  Bottom 1.016: v33.27,8.38 R20.2 R19.2
N$123
  Bottom 0.508: L2.2 85.55,14.99 88.49,14.99 U2.1
  Bottom 1.016: C14.1 C13.2 88.65,32.38 89.66,31.37 89.66,21.37 D5.A 85.22,16.92 L2.2
N$126  (via drill 0.6)
  Top 0.762: v91.57,12.7 91.44,12.83 v91.44,14.99
  Bottom 0.508: U2.3 90.48,14.99 v91.44,14.99
  Bottom 1.016: R26.1 R18.1 93.34,10.92 v91.57,12.7
RESET
  Bottom 0.254: LCD.44 26.12,8.21 27.43,9.53 32.13,9.53 33.78,11.18
  Bottom 1.016: 34.42,11.81 R23.2 | C20.1 35.69,13.08 34.42,11.81 | 33.78,11.18 34.42,11.81
TPX1  (via drill 0.6)
  Top 0.254: v93.09,4.95 90.17,7.87 62.61,7.87 61.09,9.4 48.39,9.4 v45.97,11.81 45.47,12.32 34.92,12.32 29.34,17.91 9.02,17.91 7.62,16.51 4.95,16.51 3.81,17.65 3.81,20.83 5.46,22.48 7.87,22.48 v8.38,21.97
  Bottom 0.508: LCD.55 46.66,12.5 v45.97,11.81 44.2,10.03 | LCD.51 92.86,5.18 v93.09,4.95
  Bottom 1.016: v8.38,21.97 LCD_CON.37 | 44.2,10.03 R27.2
TPX2  (via drill 0.6)
  Top 0.254: v8.38,28.32 11.18,25.53 46.86,25.53 49.66,22.73 49.66,18.54 v48.77,17.65 | v94.87,4.83 94.74,4.95 94.74,8.64 94.11,9.27 62.74,9.27 61.59,10.41 50.04,10.41 v48.77,11.68
  Bottom 0.508: LCD.57 48.66,17.76 v48.77,17.65 v48.77,11.68 | LCD.53 v94.87,4.83
  Bottom 1.016: v8.38,28.32 LCD_CON.38
TPY1  (via drill 0.6)
  Top 0.254: v93.73,8.38 62.87,8.38 61.34,9.91 49.28,9.91 v47.5,11.68 46.35,12.83 35.18,12.83 29.59,18.41 8.76,18.41 7.37,17.02 5.21,17.02 4.32,17.91 4.32,20.07 v5.84,21.59
  Bottom 0.508: LCD.52 93.86,8.24 v93.73,8.38 | LCD.56 47.66,11.85 v47.5,11.68 44.32,8.51
  Bottom 1.016: 44.32,8.51 R28.2 | v5.84,21.59 LCD_CON.39
TPY2  (via drill 0.6)
  Top 0.254: v5.84,28.32 6.73,29.21 8.76,29.21 11.94,26.04 47.12,26.04 50.55,22.61 v50.55,20.95 | v95.76,8.38 94.36,9.78 62.99,9.78 61.85,10.92 51.44,10.92 v49.91,12.45
  Bottom 0.508: v50.55,20.95 50.42,20.95 49.66,20.2 LCD.58 49.66,18.53 49.91,18.29 v49.91,12.45 | LCD.54 95.86,8.28 v95.76,8.38
  Bottom 1.016: v5.84,28.32 LCD_CON.40
VCC  (via drill 0.6)
  Top 1.016: 7.49,10.29 v7.49,14.61 8.64,14.61 v10.03,16 | 7.49,10.29 7.49,5.71 10.03,3.17 22.99,3.17 24.26,4.45 28.32,4.45 29.08,5.21 38.73,5.21 | 7.49,10.29 v2.67,10.29 | 38.73,5.21 v38.73,6.48 | 38.73,5.21 42.8,5.21 v44.07,3.94 | v72.01,4.7 67.31,4.7 PWR.5
  Bottom 0.254: 4.45,11.3 7.62,8.13 LCD.7
  Bottom 0.762: 3.3V/5V.3 71.97,7.83 72.01,7.83
  Bottom 1.016: 4.45,11.3 C2.1 4.19,11.43 3.56,11.43 3.43,11.56 C1.1 v2.67,10.29 | R5.1 R4.1 v10.03,16 | v7.49,14.61 R6.1 | R27.1 R28.1 R24.1 39.24,6.99 v38.73,6.48 | R27.1 R25.1 | 36.2,10.03 R19.1 | 36.2,10.03 R23.1 | PWR.5 63.25,3.94 53.98,3.94 | v44.07,3.94 53.98,3.94 | R13.2 54.99,18.67 54.99,12.32 53.98,11.3 53.98,3.94 | FET2.3 73.49,9.36 71.97,7.83 | v72.01,4.7 72.01,7.83 | R27.1 36.2,10.03
VCOM  (via drill 0.6)
  Top 0.254: 61.72,1.65 61.09,1.02 41.53,1.02 39.12,3.43 v35.81,3.43
  Top 0.508: v27.05,5.71 24,5.71 22.48,4.19 10.92,4.19 v10.29,4.83
  Top 1.016: 61.72,1.65 PWR.4
  Bottom 0.254: 33.53,6.86 31.37,9.02 27.69,9.02 27.12,8.45 LCD.46 27.12,5.78 v27.05,5.71 | LCD.6 7.12,6.09 8.38,4.83 v10.29,4.83
  Bottom 1.016: 34.54,3.51 Z4.1 34.42,3.63 R29.1 C19.1 33.53,6.86 | 34.54,3.51 34.42,3.51 R22.2 | 34.54,3.51 34.62,3.43 v35.81,3.43
VLED+  (via drill 0.6)
  Top 0.508: v5.97,20.19 4.95,19.18 4.95,18.16 5.46,17.65 7.11,17.65 8.51,19.05 29.97,19.05 35.56,13.46 59.31,13.46 v60.2,14.35 62.1,14.35 v64.52,11.94
  Top 0.762: 71.37,0.89 71.5,0.76 73.41,0.76 73.53,0.89
  Top 1.016: PWR.7 71.37,0.89 | 73.53,0.89 97.54,0.89 98.81,2.16 v98.81,10.79
  Bottom 0.508: v60.2,14.35 60.33,14.48 U1.5 | 64.52,5.21 64.26,4.95 57.78,4.95 57.53,5.21
  Bottom 1.016: VLED+_E.2 4.45,20.19 v5.97,20.19 | PWR.7 68.07,4.19 65.53,4.19 64.52,5.21 C3.1 C4.1 C5.1 v64.52,11.94 | D2.K 55.98,5.21 57.53,5.21
  Bottom 2.032: VLED+.1 98.3,11.94
  Bottom 2.159: 99.31,11.94 VLED+.1 v98.81,10.79
VLED-  (via drill 0.6)
  Top 0.508: v5.97,18.67 6.99,18.67 8.13,19.81 30.35,19.81 35.94,14.22 58.42,14.22 61.47,17.27 v62.74,17.27
  Top 1.016: v62.74,17.27 62.87,17.4 98.68,17.4 v98.81,17.27
  Bottom 1.016: VLED-_E.2 4.45,17.14 v5.97,18.67 | R8.2 v62.74,17.27 R12.1
  Bottom 2.032: VLED-.1 98.3,18.41
  Bottom 2.159: 99.31,18.41 VLED-.1 v98.81,17.27

## Text on the board
bNames: (C) 2013 | Rev.A | A13-LCD10TS | +5V_ONLY | 1 | HTTPS://WWW.OLIMEX.COM | 3.3V/ | +20V | +10.8V | 5V | +3.75V | +3.3V | -8.2V | 9.7V | GND